# Altium PCB cps_tc_pishield.PcbDoc
Units mm, origin at the board's own origin, x right, y up, seen from the top; angles counter-clockwise.
Board outline 64.99 x 56 mm, 4 copper layers (Top Layer, Int1 (GND), Int2 (PWR), Bottom Layer), stack 1.369 mm thick; 32 components, 44 nets, 160 pads, 74 vias.
Unrouted connection lines stored in the file: 2.
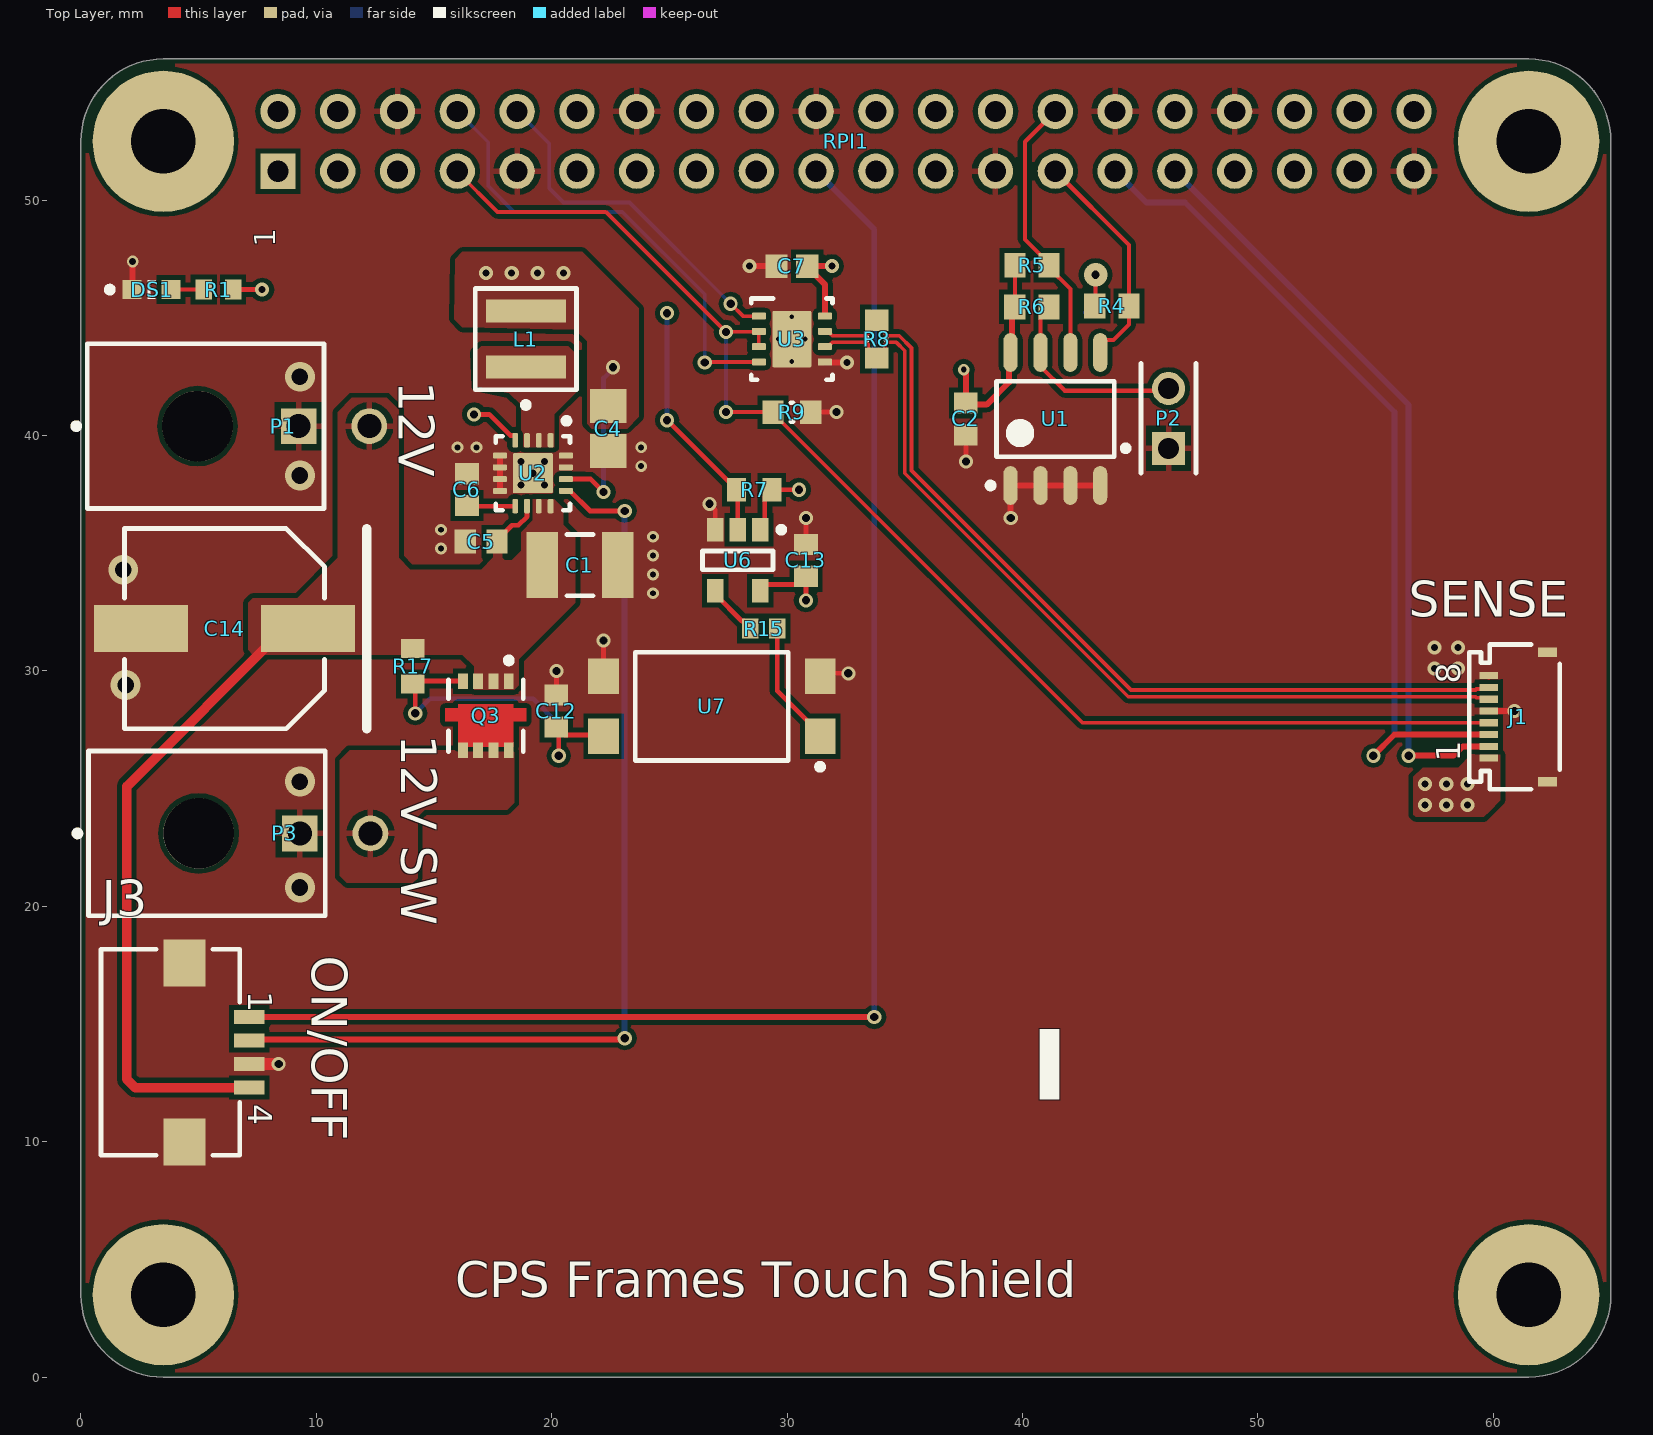
[diagram p0: Top Layer view]
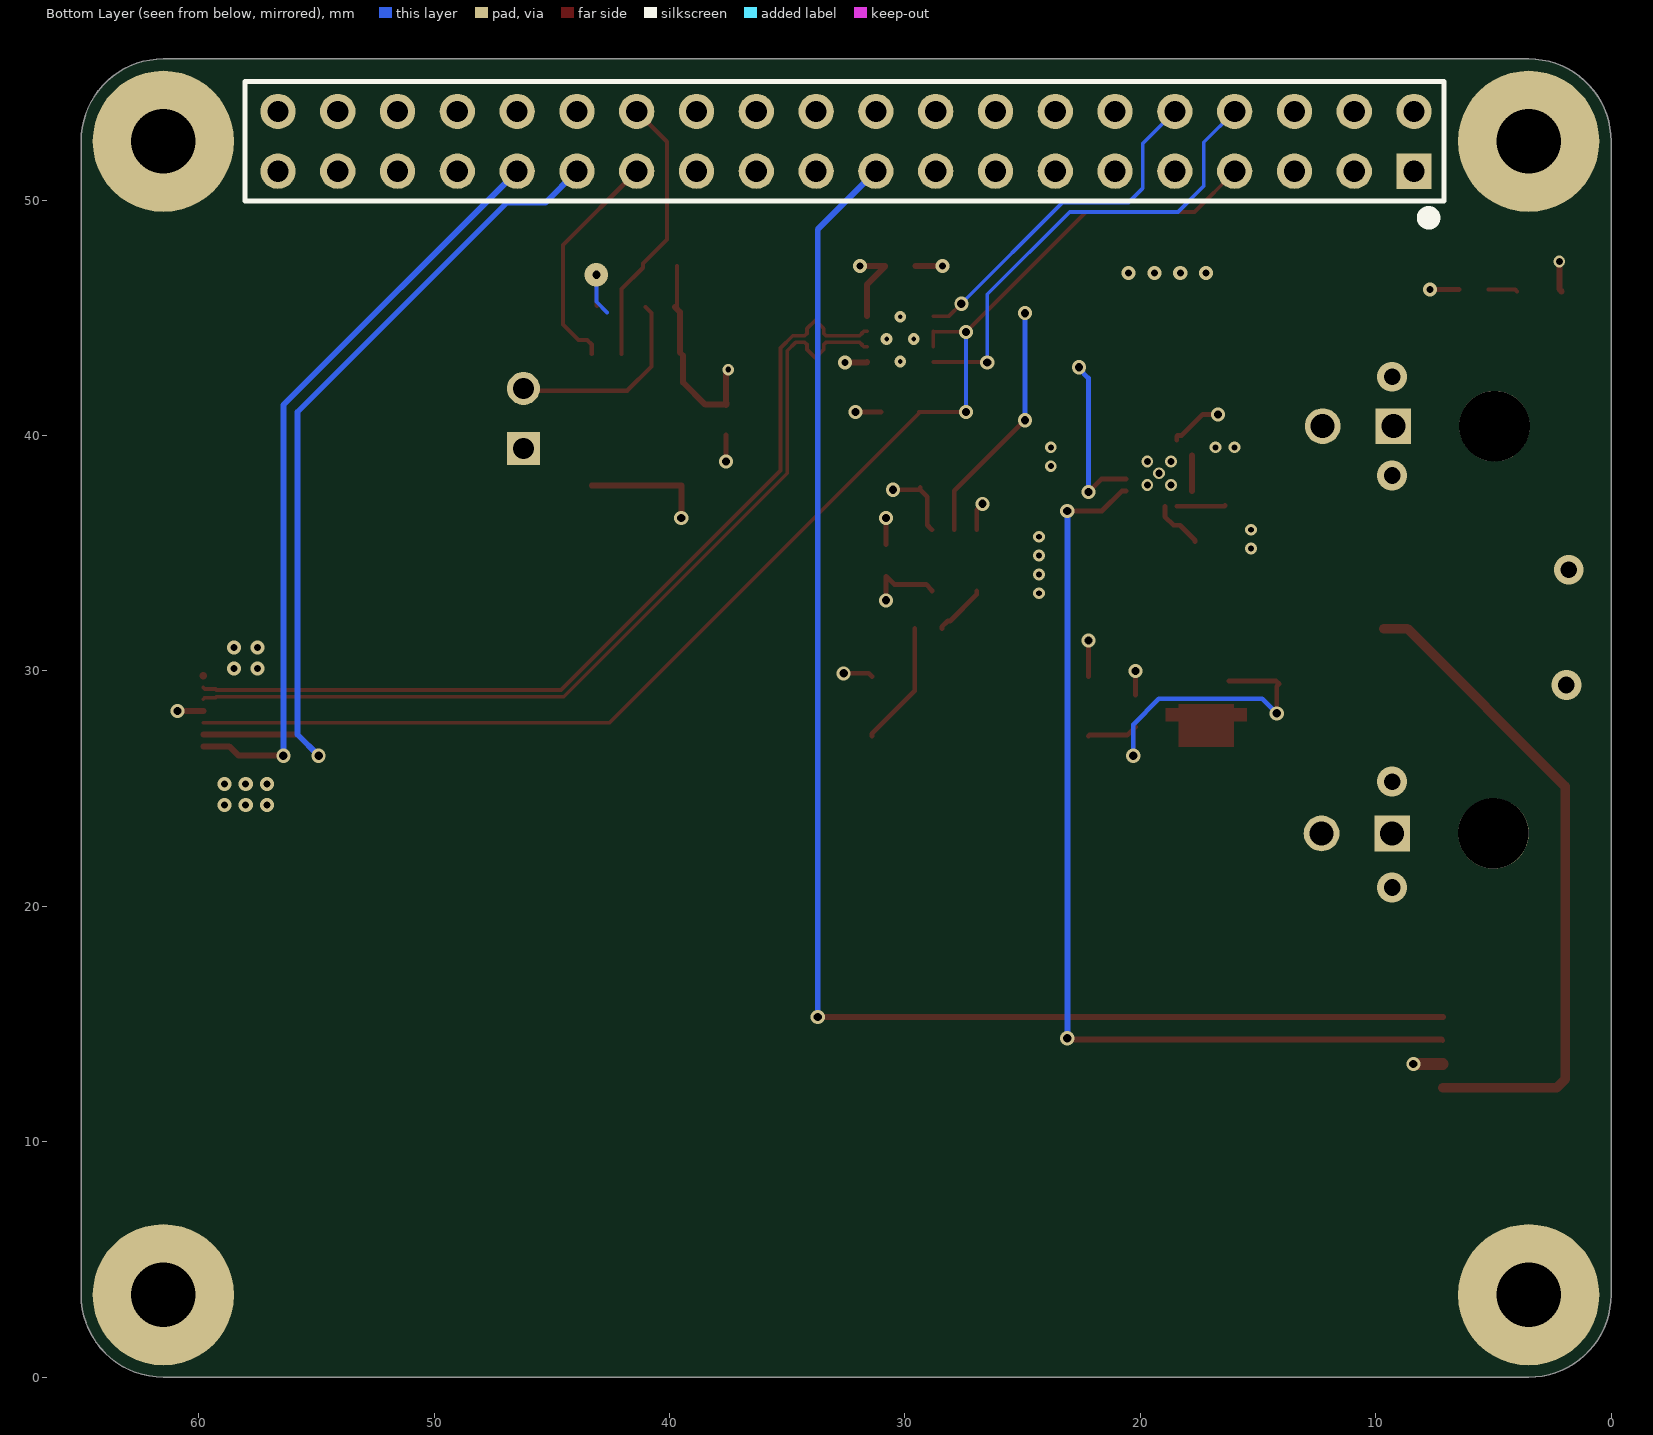
[diagram p1: Bottom Layer view, seen from below]
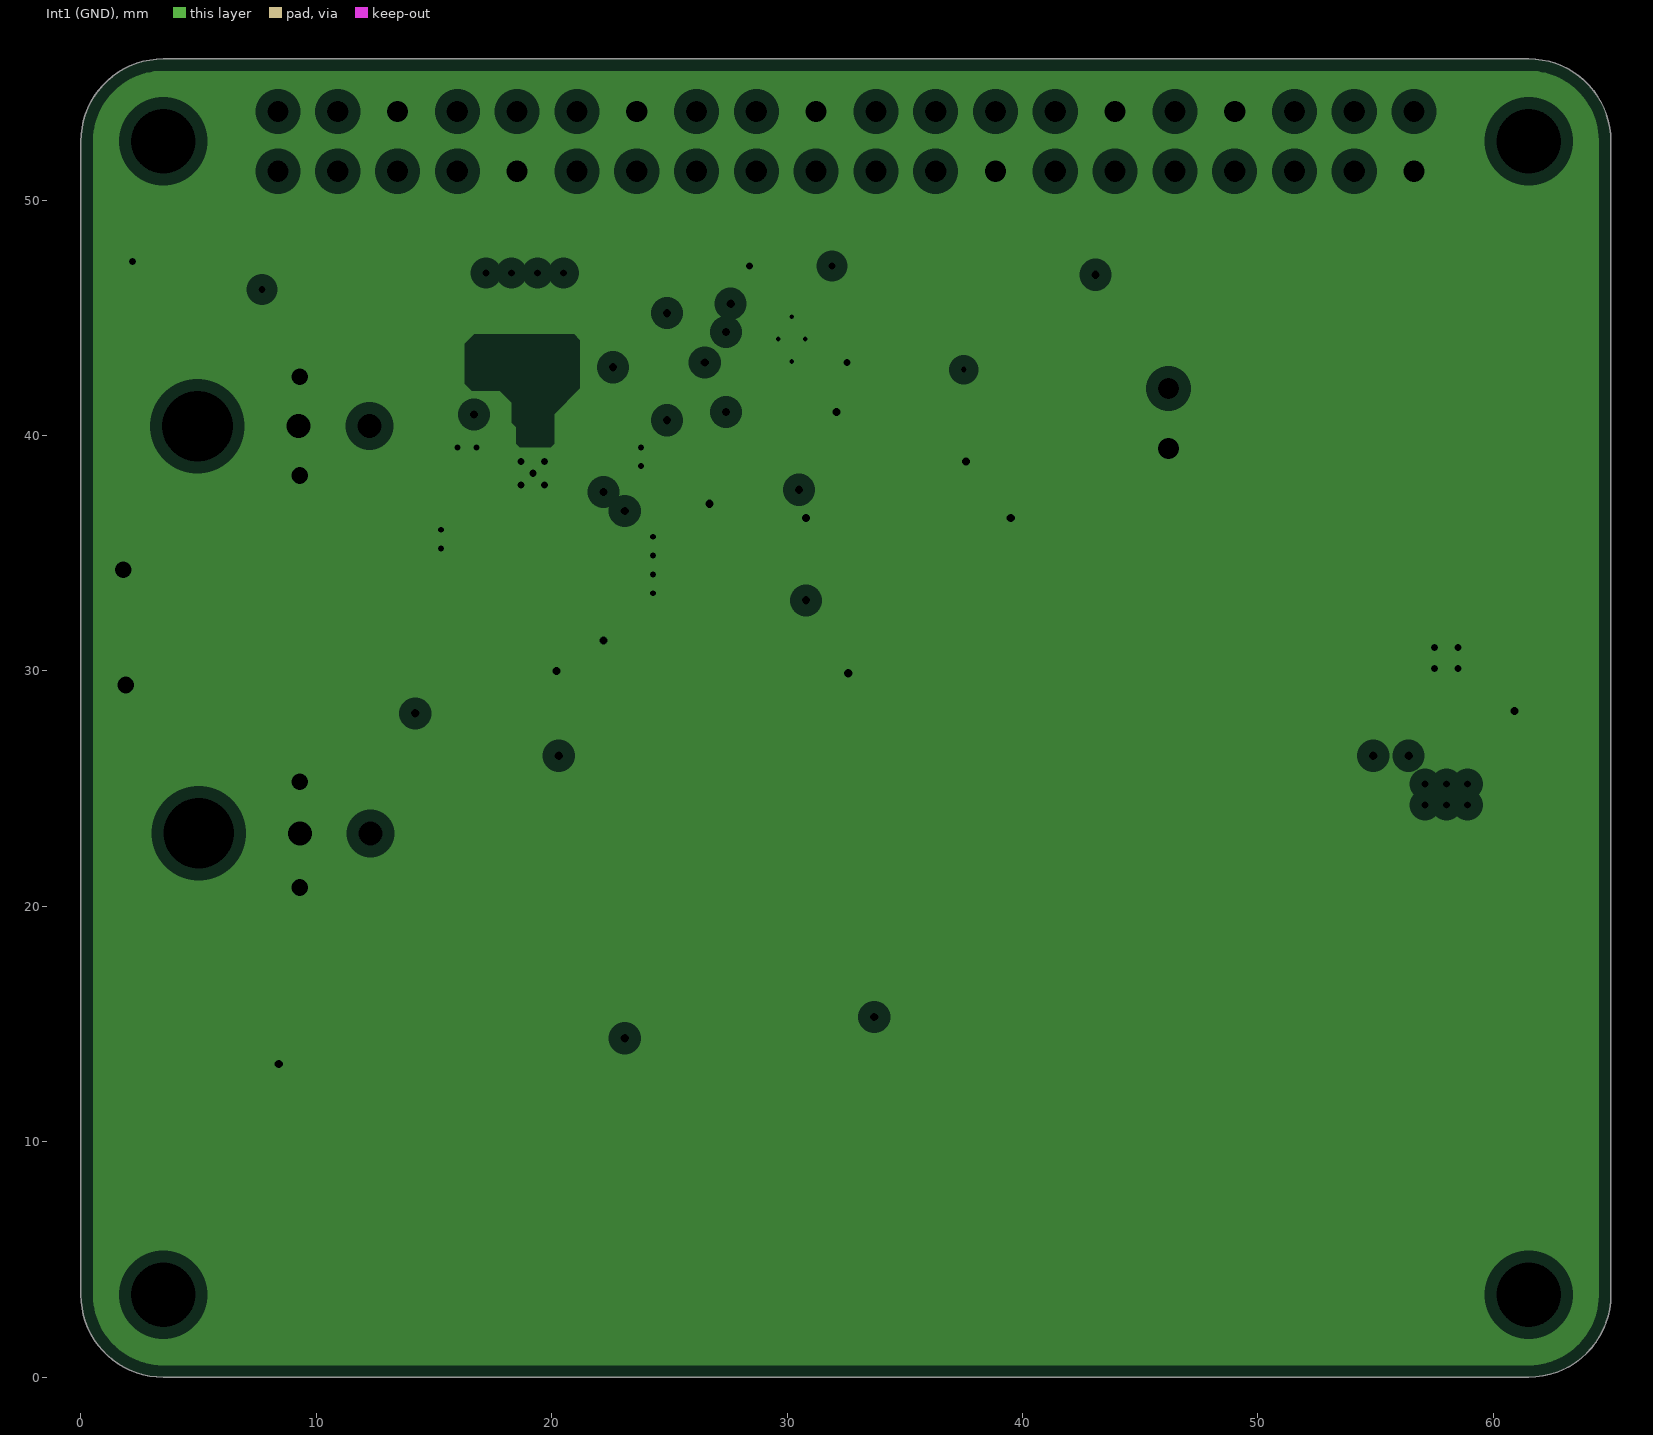
[diagram p2: Int1 (GND), clearances drawn from the general rule]
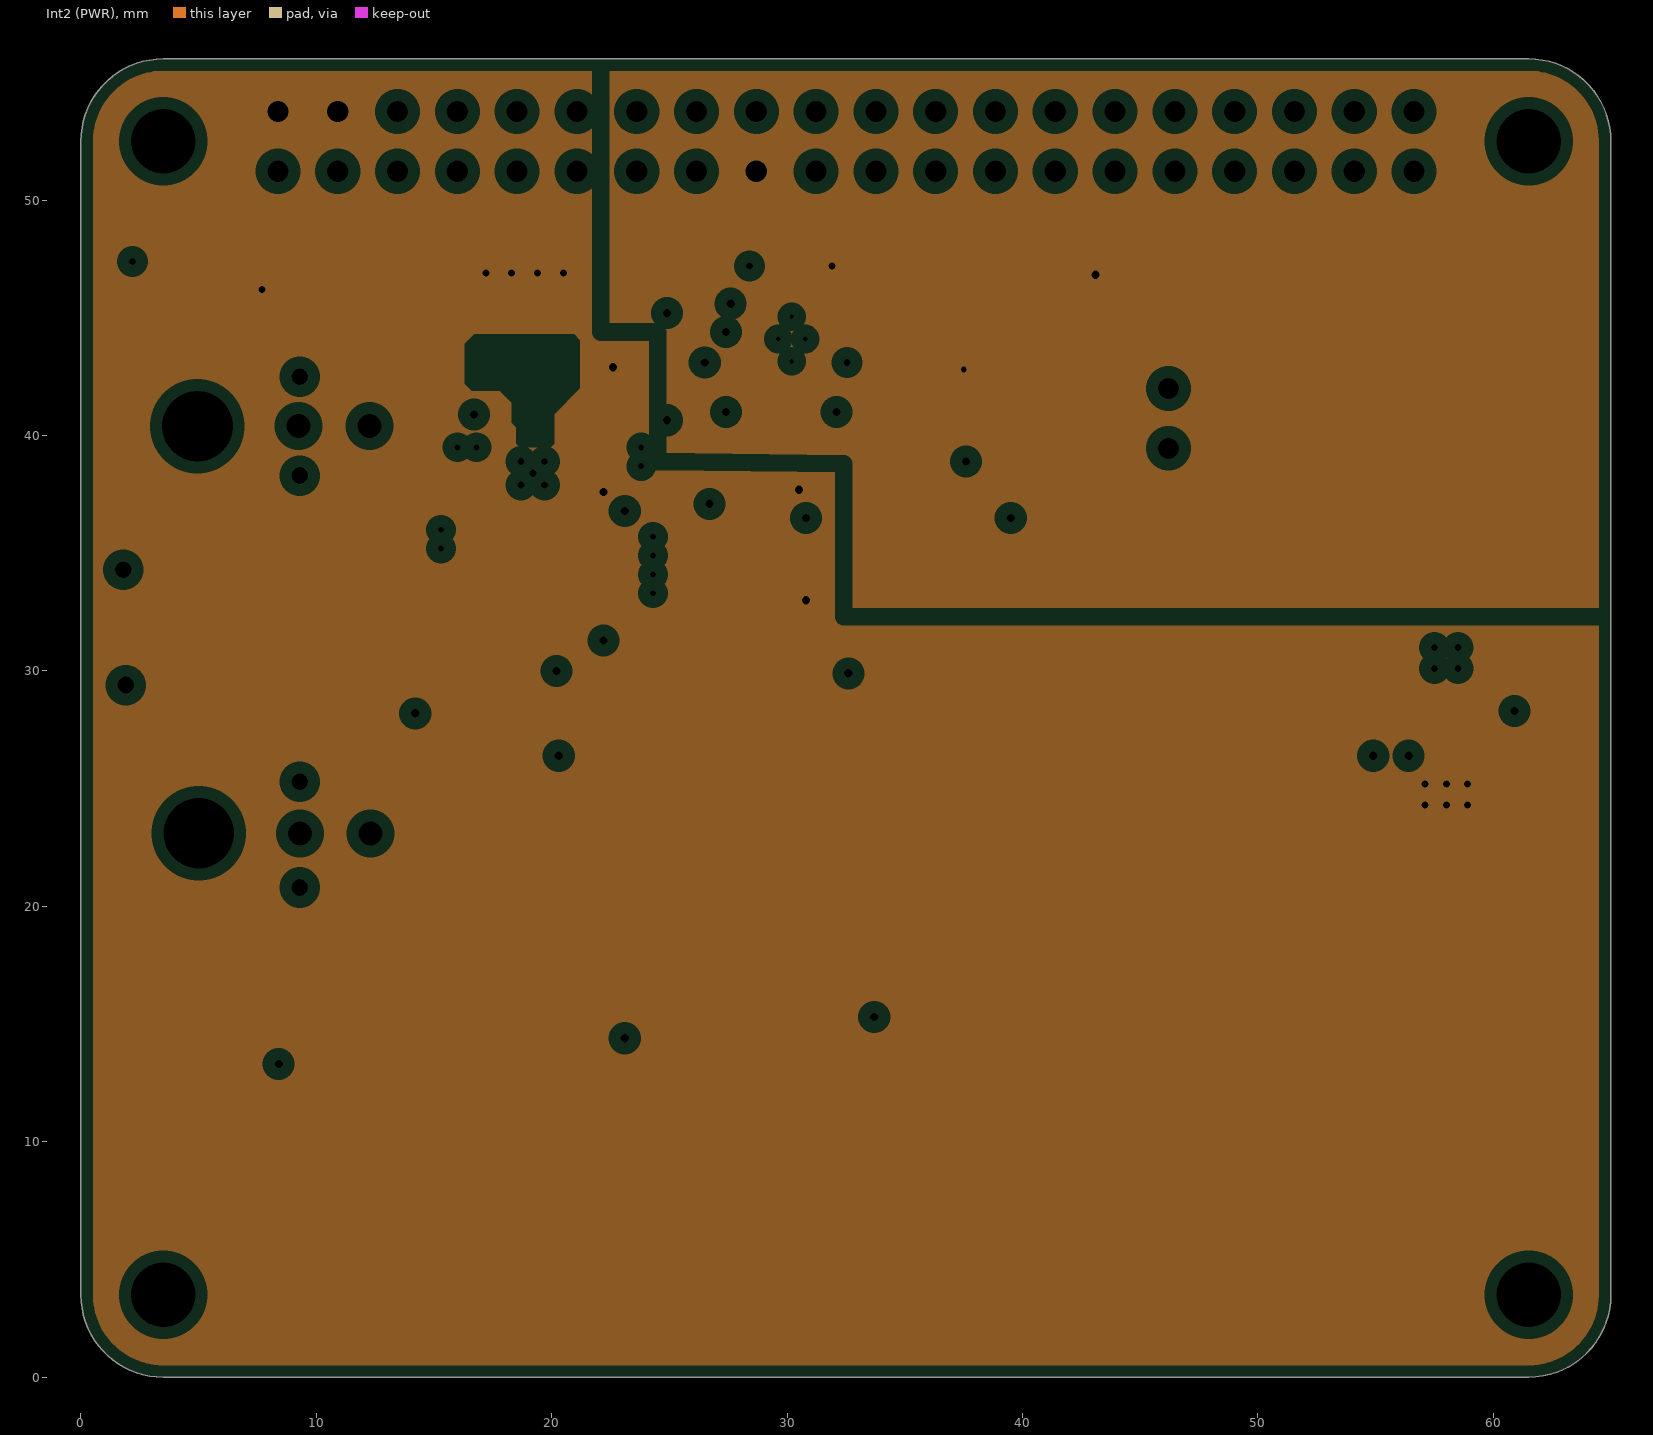
[diagram p3: Int2 (PWR), clearances drawn from the general rule]

## Layer stack, top to bottom
Top Solder: solder mask 0.0254, SM-001, Dk 4
Top Layer: signal copper 0.035
Dielectric 1: prepreg 0.1295, PP-017, Dk 4.3
Dielectric 2: prepreg 0.1295, PP-017, Dk 4.3
Int1 (GND): plane copper 0.035, net GND
Dielectric 3: core 0.7112, Core-039, Dk 4.8
Int2 (PWR): plane copper 0.035, net (Multiple Nets)
Dielectric 4: prepreg 0.1295, PP-017, Dk 4.3
Dielectric 5: prepreg 0.1295, PP-017, Dk 4.3
Bottom Layer: signal copper 0.035
Bottom Solder: solder mask 0.0254, SM-001, Dk 4

## Board outline
0,3.5 ccw(c3.5,3.5) 3.5,0 61.5,0 ccw(c61.496,3.496) 64.992,3.5 64.992,52.5 ccw(c61.496,52.504) 61.5,56 3.5,56 ccw(c3.5,52.5) 0,52.5

## Design rules (kind name [scope] priority, off if disabled: settings)
BoardOutlineClearance [All] p1: gap=0.2 ignorepadtopadclearanceinfootprint=FALSE except(0.4: Arc-SplitBarrior Arc-SplitContinuation Track-SplitBarrior Track-SplitContinuation SMDPad-SplitBarrior SMDPad-SplitContinuation THPad-SplitBarrior THPad-SplitContinuation Via-SplitBarrior Via-SplitContinuation Fill-SplitBarrior Fill-SplitContinuation Poly-SplitBarrior Poly-SplitContinuation Region-SplitBarrior Region-SplitContinuation Text-SplitBarrior Text-SplitContinuation)
Clearance [All] p1: gap=0.2 ignorepadtopadclearanceinfootprint=FALSE except(0.089: Arc-Arc Arc-Track Arc-SMDPad Track-Track Track-SMDPad SMDPad-SMDPad; 0.127: Arc-Via Track-Via SMDPad-Via THPad-Via Via-Via; 0.254: Arc-Text Track-Text SMDPad-Text THPad-Text Via-Text Fill-Text Poly-Text Region-Text Text-Text)
Clearance "Clearance Bottom Layer" [OnLayer('Bottom Layer')] p2: gap=0.203 ignorepadtopadclearanceinfootprint=TRUE except(0.254: Arc-Text Track-Text SMDPad-Text THPad-Text Via-Text Fill-Text Poly-Text Region-Text Text-Text)
Clearance "Clearance Top Layer" [OnLayer('Top Layer')] p3: gap=0.203 ignorepadtopadclearanceinfootprint=TRUE except(0.254: Arc-Text Track-Text SMDPad-Text THPad-Text Via-Text Fill-Text Poly-Text Region-Text Text-Text)
DiffPairsRouting RS485 [InDifferentialPair('RS485')] p1: maxlimit=0.127 minlimit=0.127 mostfreqgap=0.127 toplayer_minwidth=0.157 toplayer_maxwidth=0.157 toplayer_prefwidth=0.157 bottomlayer_minwidth=0.157 bottomlayer_maxwidth=0.157 bottomlayer_prefwidth=0.157 impedanceprofiledriven=TRUE impedanceprofileid={2957A7B5-88C2-4469-BF19-BCCFE4860604} impedanceprofilevalue=100.000000 maxuncoupledlength=12.7
DiffPairsRouting [All] p2: maxlimit=0.254 minlimit=0.254 mostfreqgap=0.254 toplayer_minwidth=0.381 toplayer_maxwidth=0.381 toplayer_prefwidth=0.381 bottomlayer_minwidth=0.381 bottomlayer_maxwidth=0.381 bottomlayer_prefwidth=0.381 maxuncoupledlength=12.7
HoleSize [All] p1: absolutevalues=TRUE maxlimit=6.3 minlimit=0.2 maxpercent=80.000 minpercent=20.000
MinimumAnnularRing [All] p1: minimumring=0.076
MinimumSolderMaskSliver [All] p1: minsoldermaskwidth=0.1
PlaneClearance [All] p1: clearance=0.508
PlaneConnect [All] p1: pad.planeconnectstyle=Relief pad.reliefexpansion=0.508 pad.reliefentries=4 pad.reliefconductorwidth=0.254 pad.reliefairgap=0.254 via.planeconnectstyle=Direct via.reliefexpansion=0.508 via.reliefentries=4 via.reliefconductorwidth=0.254 via.reliefairgap=0.254
PolygonConnect PolygonConnect_GND [InNet('GND') vs InNet('GND')] p1: thpad.connectstyle=Relief thpad.reliefconductorwidth=0.254 thpad.reliefentries=4 thpad.polygonreliefangle="90 Angle" thpad.airgapwidth=0.254 smdpad.connectstyle=Direct smdpad.reliefconductorwidth=0.254 smdpad.reliefentries=4 smdpad.polygonreliefangle="90 Angle" smdpad.airgapwidth=0.254 via.connectstyle=Direct via.reliefconductorwidth=0.254 via.reliefentries=4 via.polygonreliefangle="90 Angle" via.airgapwidth=0.254
PolygonConnect PolygonConnect_VIN [InNet('VIN') vs InNet('VIN')] p2: thpad.connectstyle=Relief thpad.reliefconductorwidth=0.254 thpad.reliefentries=4 thpad.polygonreliefangle="90 Angle" thpad.airgapwidth=0.254 smdpad.connectstyle=Direct smdpad.reliefconductorwidth=0.254 smdpad.reliefentries=4 smdpad.polygonreliefangle="90 Angle" smdpad.airgapwidth=0.254 via.connectstyle=Direct via.reliefconductorwidth=0.254 via.reliefentries=4 via.polygonreliefangle="90 Angle" via.airgapwidth=0.254
PolygonConnect PolygonConnect_SW [InNet('SW') vs InNet('SW')] p3: thpad.connectstyle=Relief thpad.reliefconductorwidth=0.254 thpad.reliefentries=4 thpad.polygonreliefangle="90 Angle" thpad.airgapwidth=0.254 smdpad.connectstyle=Direct smdpad.reliefconductorwidth=0.254 smdpad.reliefentries=4 smdpad.polygonreliefangle="90 Angle" smdpad.airgapwidth=0.254 via.connectstyle=Direct via.reliefconductorwidth=0.254 via.reliefentries=4 via.polygonreliefangle="90 Angle" via.airgapwidth=0.254
PolygonConnect PolygonConnect_5V [InNet('+5') vs InNet('+5')] p4: thpad.connectstyle=Relief thpad.reliefconductorwidth=0.254 thpad.reliefentries=4 thpad.polygonreliefangle="90 Angle" thpad.airgapwidth=0.254 smdpad.connectstyle=Direct smdpad.reliefconductorwidth=0.254 smdpad.reliefentries=4 smdpad.polygonreliefangle="90 Angle" smdpad.airgapwidth=0.254 via.connectstyle=Direct via.reliefconductorwidth=0.254 via.reliefentries=4 via.polygonreliefangle="90 Angle" via.airgapwidth=0.254
PolygonConnect PolygonConnect_VSWITCH [InNet('VSWITCH') vs InNet('VSWITCH')] p5: thpad.connectstyle=Relief thpad.reliefconductorwidth=0.254 thpad.reliefentries=4 thpad.polygonreliefangle="90 Angle" thpad.airgapwidth=0.254 smdpad.connectstyle=Direct smdpad.reliefconductorwidth=0.254 smdpad.reliefentries=4 smdpad.polygonreliefangle="90 Angle" smdpad.airgapwidth=0.254 via.connectstyle=Direct via.reliefconductorwidth=0.254 via.reliefentries=4 via.polygonreliefangle="90 Angle" via.airgapwidth=0.254
PolygonConnect [All] p6: thpad.connectstyle=Relief thpad.reliefconductorwidth=0.508 thpad.reliefentries=4 thpad.polygonreliefangle="90 Angle" thpad.airgapwidth=0.254 smdpad.connectstyle=Relief smdpad.reliefconductorwidth=0.508 smdpad.reliefentries=4 smdpad.polygonreliefangle="90 Angle" smdpad.airgapwidth=0.254 via.connectstyle=Direct via.reliefconductorwidth=0.508 via.reliefentries=4 via.polygonreliefangle="90 Angle" via.airgapwidth=0.254
RoomDefinition U_TC_switch_to_shield_connection [InComponentClass('U_TC_switch_to_shield_connection')] p1: confinementstyle=ConfineIn formatcopy=TRUE lockcomponents=FALSE outline 8.3,19.1 8.3,8.031 0.149,8.031 0.149,19.1
RoomDefinition U_TC_SMPS [InComponentClass('U_TC_SMPS')] p2: confinementstyle=ConfineIn formatcopy=TRUE lockcomponents=FALSE outline -0.704,36.421 -0.704,44.379 0.721,44.379 0.721,46.979 4.457,46.979 4.457,47.079 7.215,47.079 7.215,46.629 21.429,46.629 21.429,42.729 23.979,42.729 23.979,38.979 30.529,38.979 30.529,36.329 31.829,36.329 31.829,31.179 32.429,31.179 32.429,25.426 13.572,25.426 13.572,19.121 -0.654,19.121 -0.654,36.421
RoomDefinition U_TC_Interface [InComponentClass('U_TC_Interface')] p3: confinementstyle=ConfineIn formatcopy=TRUE lockcomponents=FALSE outline 28.096,41.996 28.096,46.204 28.571,46.204 28.571,48.229 31.829,48.229 31.829,46.204 32.304,46.204 32.304,45.879 34.829,45.879 63.304,45.879 63.304,31.604 63.304,24.496 57.178,24.496 57.178,39.971 28.421,39.971 28.421,41.996
RoomDefinition "U_RPI Hat ID" [InComponentClass('U_RPI Hat ID')] p4: confinementstyle=ConfineIn formatcopy=TRUE lockcomponents=FALSE outline 36.566,39.076 36.566,42.334 38.116,42.334 38.116,45.134 38.416,45.134 38.416,46.794 38.421,46.794 38.421,48.559 42.379,48.559 42.379,46.834 45.774,46.834 45.774,43.444 47.749,43.444 47.749,38.016 44.674,38.016 44.674,36.276 38.116,36.276 38.116,39.076
RoomDefinition "U_RPI 3" [InComponentClass('U_RPI 3')] p5: confinementstyle=ConfineIn formatcopy=TRUE lockcomponents=FALSE outline 6.721,49.606 6.721,55.394 58.381,55.394 58.381,49.606
RoutingCorners [All] p1: cornerstyle=Round minsetback=2.54 maxsetback=2.54
RoutingVias [All] p1: holewidth=0.5 width=1 viastyle="Through Hole" minholewidth=0.2 minwidth=0.45 maxholewidth=1 maxwidth=2
SilkToSilkClearance [All] p1: silktosilkclearance=0.1
SilkToSolderMaskClearance [IsPad] p1: minsilkscreentomaskgap=0.1 clearancetoexposedcopper=TRUE
SolderMaskExpansion [All] p1: expansion=0.102
Width [All] p1: maxlimit=2.54 minlimit=0.089 preferedwidth=0.381
22 further rules are at their usual default settings.

## Classes and differential pairs
component class U_TC_switch_to_shield_connection: J3
component class U_TC_SMPS: C1 C4 C5 C6 C12 C13 C14 DS1 L1 P1 P3 Q3 R1 R7 R15 R17 U2 U6 U7
component class U_TC_Interface: C7 J1 R8 R9 U3
component class "U_RPI Hat ID": C2 P2 prog R4 R5 R6 U1
component class "U_RPI 3": RPI1
differential pair RS485: +RS485_P -RS485_N

## Components (designator, comment, footprint, x,y, rotation, side; value= is the part's Value field where it differs from the comment)
C1 "10uF" CAPC1210(3225)210_M 21.2,34.5 r180 top
C2 "0.1uF" CAPC1608X87X35NL15T15 37.595,40.705 r270 top
C4 "22uF" CAPC2013X95X45ML15T25 22.4,40.3 r90 top
C5 "0.1uF" CAPC1608X87X35NL15T15 17,35.5 r180 top
C6 "3.3nF" CAPC1608X87X35NL15T15 16.4,37.7 r270 top
C7 "0.1uF" CAPC1608X95X40NL15T15 30.2,47.2 r0 top
C12 "0.1uF" CAPC1608X87X35NL15T15 20.2,28.3 r90 top
C13 "0.1uF" CAPC1608X87X35NL15T15 30.8,34.7 r90 top
C14 "470uF" PNSC-FK-V-F_V 6.1,31.8 r180 top
DS1 "APG1608SURKC/T" KING-LED0603-25-RED_V 3,46.2 r180 top
J1 "687108182122" 687108182122 60.9,28.05 r90 top
J3 "686104148922" 686104148922 3.8,13.8 r270 top
L1 "XFL4020-222MEC" COIL-IND-2_V 18.9,44.1 r90 top
P1 "66200221022" 66200221022 5.3,40.4 r270 top
P2 "5-146280-2" TECO-5-146280-2_V 46.2,40.73 r90 top
P3 "66200221022" 66200221022 5.35,23.1 r270 top
Q3 "NTTFS3A08PZTAG" ONSC-WDFN-8-511AB_V 17.2,28.1 r270 top
R1 "1K" RESC1608X55X30LL15T15 5.836,46.2 r0 top
R4 "3.9K" RESC1608X55X30ML15T15 43.795,45.505 r180 top
R5 "3.9K" RESC1608X55X30ML15T15 40.4,47.23 r180 top
R6 "1K" RESC1608X55X30ML15T15 40.395,45.465 r180 top
R7 "100k" RESC1608X55X25ML10T15 28.6,37.7 r0 top
R8 "100R" RESC0603(1608)_N 33.8,44.1 r90 top value="10000.00 Ohm"
R9 "10K" RESC0603(1608)_N 30.2,41 r0 top value="10000.00 Ohm"
R15 "220R" RESC1609X50X30LL10T20 29,31.8 r0 top
R17 "100k" RESC1608X55X25ML10T15 14.1,30.2 r90 top
RPI1 "RPI GPIO Connector" RPI 32.5,52.5 r180 top locked
U1 "M24C02-WMN6TP" STM-M24C02-WMN6TP-8_M 41.395,40.705 r90 top
U2 "TPS62143RGTT" RGT0016C_V 19.2,38.4 r270 top
U3 "SN65HVD75DRBT" DRB0008B_V 30.2,44.1 r0 top
U6 "NC7SZ08M5X" FAIR-SOT23-5_V 27.9,34.7 r270 top
U7 "FOD817BSD" FAIR-MDIP-4_V 26.8,28.5 r180 top

## Footprints (in the part's own frame and the unit in brackets; to place one, negate y for a bottom-side part, rotate by r counter-clockwise, add the part's x,y. Pads: shape width x height; smd on the part's side, far side on the other; paste and mask are expansions set on the pad)
66200221022 [mm] "Dual row Right angle header With plastic peg 02p"
  rect 1.52x1.52 hole 1.02: 1(0,3.95)
  round 1.52 hole 1.02: 2(0,6.95)
  round 3 hole 3 unplated: MH1(0,-0.35)
  silkscreen extent -3.5,-5.62 3.5,5.02, body extent -3.35,-4.95 3.35,7.27, height 8.79
686104148922 [mm] "ZIF Connectors, Horizontal, Bottom Contact Hinge Type, pitch 1mm, 4p"
  rect 0.6x1.3 smd: 1(-1.5,3.35) 2(-0.5,3.35) 3(0.5,3.35) 4(1.5,3.35)
  rect 2x1.8 smd: MP1(-3.8,0.6) MP2(3.8,0.6)
  silkscreen extent -4.38,-2.95 4.38,2.95, body extent -4.3,-2.9 4.3,3.6, height 2.27
687108182122 [mm] "ZIF Connectors, Horizontal, Dual Contact Back Locking, pitch 0.5mm, 8p"
  rect 0.3x0.8 smd: 1(-1.75,1.1) 2(-1.25,1.1) 3(-0.75,1.1) 4(-0.25,1.1) 5(0.25,1.1) 6(0.75,1.1) 7(1.25,1.1) 8(1.75,1.1)
  rect 0.4x0.8 smd: MP1(-2.75,-1.4) MP2(2.75,-1.4)
  silkscreen extent -3.07,-1.92 3.08,1.92, body extent -3,-1.85 3,1.85, height 0.98
CAPC1210(3225)210_M [mm] "Chip Capacitor, Body 3.2x2.5mm, Height 2.1mm, IPC Low Density"
  rect 1.35x2.8 smd: 1(-1.6,0) 2(1.6,0)
  silkscreen extent -0.55,-1.3 0.55,1.3, body extent -1.7,-1.35 1.7,1.35, height 2.1
CAPC1608X87X35NL15T15 [mm] "Chip Capacitor, 2-Leads, Body 1.60x0.80mm, IPC Medium Density"
  rect 0.9x1 smd: 1(-0.675,0) 2(0.675,0)
  body extent -0.87,-0.48 0.87,0.47, height 0.87
CAPC1608X95X40NL15T15 [mm] "Chip Capacitor, 2-Leads, Body 1.60x0.80mm, IPC Medium Density"
  rect 0.95x1 smd: 1(-0.65,0) 2(0.65,0)
  body extent -0.88,-0.48 0.87,0.47, height 0.95
CAPC2013X95X45ML15T25 [mm] "Chip Capacitor, 2-Leads, Body 2.00x1.25mm, IPC Low Density"
  rect 1.45x1.55 smd: 1(-0.95,0) 2(0.95,0)
  body extent -1.08,-0.7 1.07,0.7, height 0.95
COIL-IND-2_V [mm] "Inductor, 2-Leads, Body 4.3x4.3mm, Pitch 2.37mm"
  rect 0.98x3.4 smd paste+0: 1(-1.185,0) 2(1.185,0)
  silkscreen extent -2.92,-2.15 2.15,2.15, body extent -2.15,-2.15 2.15,2.15, height 2.1
DRB0008B_V [mm] "SON, 8-Leads, Body 3x3mm, Pitch 0.65mm, Thermal Pad 2.4x1.65mm, TI Recommended"
  rrect33% 0.6x0.3 smd: 1(-1.4,0.975) 2(-1.4,0.325) 3(-1.4,-0.325) 4(-1.4,-0.975) 5(1.4,-0.975) 6(1.4,-0.325) 7(1.4,0.325) 8(1.4,0.975)
  rrect6% 1.65x2.4 smd paste-1.2: 9(0,0)
  silkscreen extent -1.73,-1.73 1.73,1.73, body extent -1.5,-1.5 1.5,1.5, height 0.96
FAIR-MDIP-4_V [mm] "SMD, 4-Leads, Body 6.5x4.6mm, Pitch 2.54mm"
  rect 1.3x1.5 smd: 1(-4.6,1.27) 2(-4.6,-1.27) 3(4.6,-1.27) 4(4.6,1.27)
  silkscreen extent -4.73,-2.3 3.25,2.69, body extent -5.08,-2.3 5.08,2.3, height 3.85
FAIR-SOT23-5_V [mm] "SOT23, 5-Leads, Body 3x1.7mm, Pitch 0.95mm"
  rect 1x0.7 smd: 1(-1.3,0.95) 2(-1.3,0) 3(-1.3,-0.95) 4(1.3,-0.95) 5(1.3,0.95)
  silkscreen extent -1.42,-1.5 0.4,1.98, body extent -1.5,-1.5 1.5,1.5, height 1.45
KING-LED0603-25-RED_V [mm] "LED, SMT, Body 1.6x0.8mm, 0.28mm Thickness, Red"
  rect 0.8x0.8 smd paste+0: 1(-0.825,0) 2(0.825,0)
  silkscreen extent -0.2,-0.4 1.9,0.4, body extent -0.8,-0.4 0.8,0.4, height 0.28
ONSC-WDFN-8-511AB_V [mm] "DFN, 8-Leads, Body 3.05x3.05mm, Pitch 0.65mm"
  rect 0.66x0.42 smd: 1(-1.47,0.975) 2(-1.47,0.325) 3(-1.47,-0.325) 4(-1.47,-0.975) 5(1.47,-0.975) 6(1.47,-0.325) 7(1.47,0.325) 8(1.47,0.975)
  Top Layer region: 0.25,-1.73 0.25,1.73 -0.32,1.73 -0.32,-1.73
  Top Layer region: 1.33,-1.185 1.33,1.185 -0.5,1.185 -0.5,-1.185
  silkscreen extent -2.47,-1.59 1.53,1.59, body extent -1.53,-1.53 1.53,1.53, height 0.8
PNSC-FK-V-F_V [mm] "CAPAE, 2-Leads, Body 8.50x8.50mm"
  rect 4x2 smd: 1(-3.55,0) 2(3.55,0)
  silkscreen extent -6.05,-4.25 4.25,4.25, body extent -5,-4.25 5,4.25, height 10.5
RESC0603(1608)_N [mm] "Chip Resistor, Body 1.6x0.8mm, IPC Medium Density"
  rect 0.9x1 smd: 1(-0.8,0) 2(0.8,0)
  silkscreen extent -0.05,-0.4 0.05,0.4, body extent -0.85,-0.47 0.85,0.47, height 0.6
RESC1608X55X25ML10T15 [mm] "Chip Resistor, 2-Leads, Body 1.60x0.80mm, IPC Low Density"
  rect 0.8x1 smd: 1(-0.75,0) 2(0.75,0)
  body extent -0.85,-0.45 0.85,0.45, height 0.55
RESC1608X55X30LL15T15 [mm] "Chip Resistor, 2-Leads, Body 1.60x0.80mm, IPC High Density"
  rect 0.7x0.85 smd: 1(-0.625,0) 2(0.625,0)
  body extent -0.87,-0.48 0.87,0.48, height 0.55
RESC1608X55X30ML15T15 [mm] "Chip Resistor, 2-Leads, Body 1.60x0.80mm, IPC Low Density"
  rect 0.9x1.05 smd: 1(-0.725,0) 2(0.725,0)
  body extent -0.87,-0.48 0.87,0.48, height 0.55
RESC1609X50X30LL10T20 [mm] "Chip Resistor, 2-Leads, Body 1.55x0.85mm, IPC High Density"
  rect 0.7x0.85 smd: 1(-0.575,0) 2(0.575,0)
  body extent -0.82,-0.48 0.82,0.48, height 0.5
RGT0016C_V [mm] "QFN, 16-Leads, Body 3x3mm, Pitch 0.5mm, Thermal Pad 1.65x1.65mm"
  rrect40% 0.6x0.25 smd: 1(-1.4,0.75) 2(-1.4,0.25) 3(-1.4,-0.25) 4(-1.4,-0.75) 9(1.4,-0.75) 10(1.4,-0.25) 11(1.4,0.25) 12(1.4,0.75)
  rrect40% 0.25x0.6 smd: 5(-0.75,-1.4) 6(-0.25,-1.4) 7(0.25,-1.4) 8(0.75,-1.4) 13(0.75,1.4) 14(0.25,1.4) 15(-0.25,1.4) 16(-0.75,1.4)
  rrect6% 1.55x1.55 on Top Paste: 17(0,0)
  rrect6% 1.7x1.7 smd paste-0.85: 17(0,0)
  silkscreen extent -2.35,-1.57 1.57,1.58, body extent -1.5,-1.5 1.5,1.5, height 1
RPI [mm]
  rect 1.5x1.5 hole 0.9: 1(24.13,1.27)
  round 1.5 hole 0.9: 2(24.13,-1.27) 3(21.59,1.27) 4(21.59,-1.27) 5(19.05,1.27) 6(19.05,-1.27) 7(16.51,1.27) 8(16.51,-1.27) 9(13.97,1.27) 10(13.97,-1.27) 11(11.43,1.27) 12(11.43,-1.27) 13(8.89,1.27) 14(8.89,-1.27) 15(6.35,1.27) 16(6.35,-1.27) 17(3.81,1.27) 18(3.81,-1.27) 19(1.27,1.27) 20(1.27,-1.27) 21(-1.27,1.27) 22(-1.27,-1.27) 23(-3.81,1.27) 24(-3.81,-1.27) 25(-6.35,1.27) 26(-6.35,-1.27) 27(-8.89,1.27) 28(-8.89,-1.27) 29(-11.43,1.27) 30(-11.43,-1.27) 31(-13.97,1.27) 32(-13.97,-1.27) 33(-16.51,1.27) 34(-16.51,-1.27) 35(-19.05,1.27) 36(-19.05,-1.27) 37(-21.59,1.27) 38(-21.59,-1.27) 39(-24.13,1.27) 40(-24.13,-1.27)
  body extent -25.52,-2.63 25.53,2.38, height 8.5
STM-M24C02-WMN6TP-8_M [mm] "SOIC, 8-Leads, Body 5x4mm, Pitch 1.27mm, IPC Low Density"
  oval 1.65x0.6 smd: 1(-2.825,1.905) 2(-2.825,0.635) 3(-2.825,-0.635) 4(-2.825,-1.905) 5(2.825,-1.905) 6(2.825,-0.635) 7(2.825,0.635) 8(2.825,1.905)
  silkscreen extent -2.95,-2.5 1.6,2.88, body extent -2,-2.5 2,2.5, height 1.75
TECO-5-146280-2_V [mm] "Connector, 2-Leads, Body 4.67x2.34mm, Pitch 2.54mm"
  rect 1.4x1.4 hole 0.89: 1(-1.27,0)
  round 1.4 hole 0.89: 2(1.27,0)
  silkscreen extent -2.33,-1.17 2.33,1.94, body extent -2.34,-1.17 2.34,1.17, height 5.33

## Part data
C1: library part CMP-1038-02235-1, "CAP 10uF 35V ±20% 1210 (3225 Metric) Thickness 2.1mm SMD", Case-EIA=1210, Case-Metric=3225, Rated Voltage="35 V", Tolerance=±20%, Max Thickness="2.1 mm", Technology=SMT
C2 C5 C12 C13: library part CMP-2006-03300-1, Manufacturer=Kemet, Part Number=C0603X104K5RACTU
C4: library part CMP-2007-00096-1, Manufacturer=Murata, Part Number=GRM219R61A226MEA0D
C6: library part CMP-2006-03881-1, Manufacturer=Kemet, Part Number=C0603C332K5RAC7867
C7: library part CMP-2006-01884-1, Manufacturer=Vitramon, Part Number=VJ0603Y104JXQCW1BC
C14: library part CMP-2000-06204-1, "Aluminum Electrolytic Capacitor, 470 uF, +/- 20%, 16 V, 2-Pin SMD (Size Code F), -55 to 105 degC, RoHS, Tape and Reel", Capacitance=470µF, Case Size/Dimension=Ø8x10.2mm, Lifetime@Temperature=2000Hrs@105°C, Manufacturer=Panasonic, Operating Temp-Max=105°C, Operating Temp Range=-55to+105°C, Package Description="2-Pin Electrolytic Aluminum Capacitor, Body 8.3 x 8.3 mm", Package Reference=FK-V-F, Rated Voltage=16V, Ripple Current=600mA, Datasheet URL=http://industrial.panasonic.com/cdbs/www-data/pdf/RDE0000/ABA0000C1181.pdf, Datasheet Version=03/2016, Impedance=0.16O, Manufacturer URL=http://www.panasonic.com/, Mounting Technology=SurfaceMount, Package URL=http://industrial.panasonic.com/cdbs/www-data/pdf/RDE0000/DME0000COL48.pdf, Series=FK, Type=Can
DS1: library part CMP-0404-00004-1, "Ultra Thin Hyper Red SMD Chip LED Lamp, 2 to 2.5 V, -40 to 85 degC, Body 1.6 x 0.8 mm, 0.28 mm Thickness, RoHS, Tape and Reel", Forward Voltage="2 to 2.5 V", Manufacturer=Kingbright, Operating Temperature="-40 to 85 degC", ComponentLink1Description="Manufacturer URL", ComponentLink1URL=http://www.kingbrightusa.com/, ComponentLink2Description=Datasheet, ComponentLink2URL=http://www.kingbrightusa.com/images/catalog/SPEC/APG1608SURKC-T.pdf, ComponentLink3Description="Package Specification", ComponentLink3URL=http://www.kingbrightusa.com/images/catalog/SPEC/APG1608SURKC-T.pdf, DatasheetVersion="Rev. V.5A", Dice="Hyper Red (AlGaInP)", IR (Max)="10 uA", Lens Type="Water Clear", Luminous Intensity mcd @ 20 mA (Min.)=55, Luminous Intensity mcd @ 20 mA (Typ.)=110, Mounting Technology="Surface Mount", PackageDescription="2-Pin SMT, Body 1.6 x 0.8 mm, 0.28mm Thickness, Red", PackageReference=LED0603-25-RED, PackageVersion="Rev. V.5A", Packing="Tape and Reel", PartNumber=APG1608SURKC/T, RoHS=TRUE, Viewing Angle=120
J1: library part CMP-1502-01646-1, "SMT ZIF Connectors WR-FPC, Horizontal, Back Locking Dual Contact, pitch 0.5 mm, 8 pins", Contact Resistance=30mOhm, Manufacturer="Wurth Elektronik", Operating Temperature=-55to85degC, Rated Current=0.5A, Withstanding Voltage=250VAC, Working Voltage=50VAC, Contact Design=BackLockingDualContact, Datasheet URL=https://katalog.we-online.de/em/datasheet/687108182122.pdf, Manufacturer URL=http://www.we-online.de, Mounting Technology=SMT, Orientation=Horizontal, Package Reference=687108182122, Packaging=TapeandReel, Part Number=687108182122, Pin Number=8, Pitch=0.5mm, Publisher=WurthElektronik
J3: library part CMP-1502-01512-1, "SMT ZIF Connectors Hinge Type WR-FPC, Horizontal, Bottom Contact, pitch 1 mm, 4 pins", Contact Resistance=50mOhm, Manufacturer="Wurth Elektronik", Operating Temperature=-40to105degC, Rated Current=1A, Withstanding Voltage=500VAC, Working Voltage=100VAC, Contact Design=BottomContact, Datasheet URL=https://katalog.we-online.de/em/datasheet/686104148922.pdf, Manufacturer URL=http://www.we-online.de, Mounting Technology=SMT, Orientation=Horizontal, Package Reference=686104148922, Packaging=TapeandReel, Part Number=686104148922, Pin Number=4, Pitch=1mm, Publisher=WurthElektronik
L1: library part CMP-2000-05090-2, "High Temperature Shielded Power Inductor, 2.2 uH, +/- 20 %, -40 to 125 degC, 2-Pin SMD, RoHS, Tape and Reel", Case Height=2.1mm, Case Length=4.3mm, Inductance=2.2uH, Manufacturer=Coilcraft, Maximum DC Current=8A, Maximum DC Resistance=23.5mOhms, Operating Temperature Range=-40Cto+125C, Self Resonant Frequency=38MHz, Test Frequency=100kHz, Tolerance=20%, Case Width=4.3mm, Core Material=Composite, Datasheet URL=http://www.mouser.com/ds/2/597/xfl4020-270756.pdf, Datasheet Version=Jul-12, Dimensions=4.3mmWx4.3mmLx2.1mmH, Manufacturer URL=http://www.coilcraft.com/, Packaging=Reel, PartNumber=XFL4020-222MEC, Product=PowerInductors, RoHS=Details, Series=XFL4020, Shielding=Shielded, Termination Style=SMD/SMT
P1 P3: library part CMP-1502-00364-1, "THT Male Header WR-MPC3, with Snap-in Plastic Pegs, Right Angled, Dual Row, pitch 3 mm, 2 pins", Contact Resistance=10mOhm, Manufacturer="Wurth Elektronik", Operating Temperature=-40to105degC, Working Voltage=250VAC, Datasheet URL=https://katalog.we-online.de/em/datasheet/6620xx21022.pdf, Gender=Male, Manufacturer URL=http://www.we-online.de, Mounting Technology=THT, Orientation=RightAngled, Package Reference=66200221022, Packaging=Tube, Part Number=66200221022, Pin Number=2, Pitch=3mm, Publisher=WurthElektronik
P2: library part CMP-2000-07492-1, "Male Header, Pitch 2.54 mm, 1 x 2 Position, Height 8.21 mm, Tail Length 3.05 mm, -65 to 105 degC, RoHS, Bulk", Case\/Package=100, Colour=Black, Current Rating=3A, Flammability Rating=UL94V-0, High Temperature Housing=Yes, Manufacturer="TE Connectivity", Max Current Rating=5A, Max Operating Temperature=105degC, Min Operating Temperature=-65degC, Package Description="Male Header, Pitch 2.54 mm, 1 x 2 Position, Height 8.21 mm, Tail Length 3.05 mm", Package Quantity=500, Approvals=CSA, Board Standoff=No(Without), Connector Type=Header, Contact Gender=Male, Contact Material=CopperAlloy, Contact Mating Length=0.23inch, Contact Plating=Matte, Contact Protection=No(Without), Contact Shape=Square, Datasheet URL=http://www.te.com/commerce/DocumentDelivery/DDEController?Action=showdoc&DocId=Customer+Drawing%7F146280%7FH1%7Fpdf%7FEnglish%7FENG_CD_146280_H1.pdf%7F5-146280-2, Datasheet Version="Rev. H1, 08/2016", Depth=2.34mm, Gasket=No(Without), High Speed Serial Data Connector=No, Housing Colour=Black, Housing Material=Polymer, Keyed=No, Length=4.67mm, Manufacturer URL=http://www.te.com/, Mating Alignment=No(Without), Mating Connector Lock=No(Without), Mating Post Length=0.23inch, Mount=ThroughHole, Mounting Technology=ThroughHole, Number of Contacts=2, Number of Positions=2, Number of Rows=1, Orientation=Straight, Package Reference=5-146280-2, Packaging=Carton, Panel Mount Retention=No(Without), PCB Mounting Orientation=Vertical, PCB Mount Retention=Without, PCB Thickness=0.063inch, Pitch=2.54mm, Radiation Hardening=No, RoHSCompliant=true, Row Spacing=2.54mm, Selectively Loaded=No(Without), Stabilizers=No(Without), Termination=ThroughHole, Termination Post Length=0.12inch
Q3: library part CMP-1058-01043-1, "Power MOSFET, -20 V, -15 A, Single P-Channel, 8-Pin WDFN, Pb-Free, Tape and Reel", Manufacturer="On Semiconductor", Package Type="u8FL / WDFN-8", Channel Polarity="P Channel", Ciss Typ (pF)=5000, ComponentLink1Description="Manufacturer URL", ComponentLink1URL=http://www.onsemi.com/, ComponentLink2Description=Datasheet, ComponentLink2URL=http://www.onsemi.cn/pub_link/Collateral/NTTFS3A08PZ-D.PDF, ComponentLink3Description="Package Specification", ComponentLink3URL=http://www.onsemi.com/pub_link/Collateral/511AB.PDF, Configuration=Single, Coss Typ (pF)=600, Crss Typ (pF)=540, DatasheetVersion="Rev. 2", ID Max (A)=15, Mounting Technology="Surface Mount", PackageDescription="8-Pin Small Outline No-Lead, Body 3.05 x 3.05 mm, Pitch 0.65 mm", PackageReference=WDFN-8-511AB, PackageVersion="Rev. D, 04/2012", Packing="Tape and Reel", PartNumber=NTTFS3A08PZTAG, Qrr Typ (nC)=234, RoHS=Pb-Free, V(BR)DSS Min (V)=20, VGS(th) Max (V)=1, VGS Max (V)=8
R1 R4 R5 R6: library part CMP-2000-00180-1, Manufacturer=Panasonic, Part Number=ERJ-3EKF1001V
R7 R17: library part CMP-2100-03662-1, "Chip Resistor, 100 KOhm, +/- 1%, 0.1 W, -55 to 155 degC, 0603 (1608 Metric), RoHS, Tape and Reel", Case/Package=0603, Case Code (Metric)=1608, Manufacturer=Yageo, Max Operating Temperature=155degC, Min Operating Temperature=-55degC, Package Description="2-Pin Surface Mount Device, Body 1.6 x 0.8 mm", Power Rating=100mW, Resistance=100KOhm, Temperature Coefficient=100ppm/degreesC, Tolerance=1%, Voltage Rating=50V, Case Code (Imperial)=0603, Composition=ThickFilm, Datasheet URL=http://www.yageo.com/NewPortal/yageodocoutput?fileName=/pdf/R-Chip/PYu-RC_Group_51_RoHS_L_5.pdf, Datasheet Version="Rev. 5, 10/2016", Depth=0.8mm, Height=0.45mm, Lead Free=LeadFree, Length=1.6mm, Manufacturer URL=http://www.yageo.com/, Military Standard=Not, Number of Pins=2, Package Reference=0603, Packaging=TapeandReel, REACH SVHC=NoSVHC, RoHSCompliant=true, Termination=SMD/SMT, Voltage Rating (DC)=50V, Width=0.8mm
R8 R9: library part CMP-1012-00623-1, "10K 0.1W 1% 0603 (1608 Metric)  SMD", Case-EIA=0603, Case-Metric=1608, Power="0.1 W", Tolerance="1 %", Technology=SMT
R15: library part CMP-2000-03085-1, Manufacturer="Vishay Dale", Part Number=CRCW0603220RFKEA
RPI1: library part "rpi connector", "GPIO Header for Raspberry Pi A+/B+/Pi 2/Pi 3 - 2x20", Manufacturer="SparkFun Electronics", Manufacturer Part Number=PRT-14017, Supplier Part Number 1=1568-1462-ND, Accessory Type=Connector, Category="Development Boards, Kits, Programmers", ComponentLink1Description=https://cdn.sparkfun.com/datasheets/Dev/RaspberryPi/12313.pdf, ComponentLink1URL=https://cdn.sparkfun.com/datasheets/Dev/RaspberryPi/12313.pdf, For Use With/Related Products="Raspberry Pi", Nils Minor=author, nilsminor@web.de=mail, Part Status=Active, Pricing 1="1=1.84 (EUR)", RoHS="RoHS Compliant", Stock 1=150, Supplier 1=Digi-Key
U1: library part CMP-2000-05370-1, "EEPROM Serial-I2C, 2Kbit, 2.5 to 5.5 V, 400 kHz, 8-Pin SO, -40 to 85 degC, RoHS, Tape and Reel", Frequency=0.4MHz, Manufacturer=STMicroelectronics, Operating Supply Voltage (Max)=5.5V, Operating Supply Voltage (Min)=2.5V, Operating Supply Voltage (Typ)=3.3/5V, Operating Temperature (Max)=85C, Operating Temperature (Min)=-40C, Operating Temperature Classification=Industrial, Operating Temp Range=-40Cto85C, Package Type=SOICN, Supply Current=2mA, Access Time (Max)=900ns, Data Retention=40, Datasheet URL=https://datasheet.ciiva.com/26870/m24c02-wmn6tp-26870257.pdf, Datasheet Version="Rev. 17, 04/2011", DELETED=Compliant, Density=2048Bit, Frequency (Max)=0.4MHz, Interface Type=Serial(I2C), Manufacturer URL=http://www.st.com/, Mounting=SurfaceMount, Organization=256x8, Packaging=TapeandReel, Pin Count=8, Programmable=Yes, Rad Hardened=No, Write Protection=Yes
U2: library part CMP-0323-00125-3, "Buck Step Down Regulator with 3 to 17 V Input and 5 V Output, -40 to 85 degC, 16-Pin QFN (RGT), Green (RoHS & no Sb/Br)", Manufacturer="Texas Instruments", Rating=Catalog, Switch Current Limit(Typ)(A)=3, Code_JEDEC=MO-220, ComponentLink1Description=Datasheet, ComponentLink1URL=http://www.ti.com/general/docs/lit/getliterature.tsp?genericPartNumber=TPS62143&fileType=pdf, ComponentLink2Description="Package Specification", ComponentLink2URL=http://www.ti.com/litv/pdf/mpqf119g, ComponentLink3Description="URL Link1", ComponentLink3URL="Samples URL:http://www.ti.com/product/tps54611#samples", DatasheetVersion=SLVSAJ0, Duty Cycle(Max)(%)=100, Eco-Plan="Green (RoHS & no Sb/Br)", Iout(Max)(A)=2, Iq(Typ)(mA)=0.017, Mounting Technology="Surface Mount", PackageDescription="16-Pin Plastic Quad Flat No-Lead, 3 x 3 mm Body, 0.5 mm Pitch, 1.7 x 1.7 mm Exposed Pad", PackageReference=RGT0016C, PackageVersion="revH, Oct-2011", PartNumber=TPS62143RGTT, Preset Vout(V)=5, Regulated Outputs(#)=1, SubFamily="Step-Down Regulator", Synchronous Rectification=TRUE, Topology=Buck, Vin(Max)(V)=17, Vin(Min)(V)=3, Vout(Max)(V)=5, Vout(Min)(V)=5
U3: library part CMP-0694-00015-2, "3.3 V Supply RS-485 with IEC ESD Protection, 20 Mbps, -40 to 125 degC, 8-Pin SON, RoHS, Tape and Reel", Manufacturer="Texas Instruments", Operating Temperature Range="-40 to 125 degC", ComponentLink1Description="Manufacturer URL", ComponentLink1URL=http://www.ti.com/, ComponentLink2Description=Datasheet, ComponentLink2URL=http://www.ti.com/lit/ds/sllse11c/sllse11c.pdf, ComponentLink3Description="Package Specification", ComponentLink3URL=http://www.ti.com/lit/ds/sllse11c/sllse11c.pdf, DatasheetVersion=SLLSE11C, ESD="15 kV", ICC (Max) (mA)=0.95, Mounting Technology="Surface Mount", No. of RX=1, No. of TX=1, PackageDescription="8-Pin Plastic Small Outline No-Lead, Body 3 x 3 mm, Pitch 0.65 mm", PackageReference=DRB0008B, PackageVersion=4203482-2/K, Packing="Tape and Reel", PartNumber=SN65HVD75DRBT, RoHS=TRUE, Signaling Rate (Max) (Mbps)=20, VCC="3 to 3.6 V", VI="-7 to 12 V"
U6: library part CMP-2000-06815-1, "TinyLogic(R) UHS 2-Input AND Gate, 1.65 to 5.5 V, -40 to 85 degC, 5-Pin SOT23, RoHS, Tape and Reel", High Level Output Current=-32mA, Low Level Output Current=32mA, Manufacturer=FairchildSemiconductor, Maximum Operating Temperature=+85C, Minimum Operating Temperature=-40C, Package / Case=SOT-23, Package Description="5-Pin Small Outline Transistor, Body 2.9 x 1.6 mm, Pitch 0.95 mm", Package Reference=SOT23-5, Package Version=08/2015, Supply Voltage - Max=5.5V, Supply Voltage - Min=1.65V, =NC7SZ08M5X_NL, <PCN>=http://www.mouser.com/PCN/3.26.10LTBDFairchild.pdf, Brand=FairchildSemiconductor, Datasheet URL=https://www.fairchildsemi.com/datasheets/NC/NC7SZ08.pdf, Datasheet Version="Rev. 1.0.3, 09/2009", Logic Family=NC7SV, Logic Function=AND, Logic Type=2-InputAND, Manufacturer URL=https://www.fairchildsemi.com/, Mounting Style=SMD/SMT, Mounting Technology=SurfaceMount, Number of Gates=1Gate, Number of Input Lines=2Input, Number of Output Lines=1Output, Package URL=https://www.fairchildsemi.com/package-drawings/MA/MA05B.pdf, Packaging=Reel, Product=Single-FunctionGate, Product Category=LogicGates, Propagation Delay Time=5.2ns, RoHS=True, Series=TinyLogic, Unit Weight=0.001058oz
U7: library part CMP-2000-06280-1, "Phototransistor Optocoupler, 4 us Rise, 3 us Fall, 5000 Vrms, -55 to 110 degC, 4-Pin MDIP, RoHS, Tape and Reel", Manufacturer="Fairchild Semiconductor", Maximum Collector Current=50mA, Maximum Collector Emitter Saturation Voltage=200mV, Maximum Collector Emitter Voltage=70V, Maximum Current Transfer Ratio=260%, Maximum Forward Voltage=1.4V, Maximum Operating Temperature=110C, Maximum Power Dissipation=200mW, Maximum Reverse Voltage=6V, Minimum Current Transfer Ratio=130%, Minimum Isolation Voltage=5000Vrms, Minimum Operating Temperature=-55C, Package Description="4-Pin Surface Mount Device, Body 6.5 x 4.6 mm, Pitch 2.54 mm", Package Reference="MDIP 4L", Package Version=10/2014, Supplier_Package=PDIPSMDBlack, Typical Forward Voltage=1.2V, Datasheet URL=https://www.fairchildsemi.com/datasheets/FO/FOD817B.pdf, Datasheet Version="Rev. 2.8, 11/2015", Family=FOD817, Input Type=DC, Manufacturer URL=https://www.fairchildsemi.com/, Maximum Fall Time=18us, Maximum Input Current=50mA, Maximum Rise Time=18us, Mounting=SurfaceMount, Mounting Technology=SurfaceMount, Number of Channels per Chip=1, Output Device=Transistor, Output Type=DC, Package URL=https://www.fairchildsemi.com/package-drawings/N0/N04C.pdf, Packaging=TapeandReel, Pin_Count=4, Product Height=4mm(Max), Product Length=5.1mm(Max), Product Type=TransistorandPhotovoltaicOutputPhotoCouplers, Product Width=7mm(Max), Typical Fall Time=3us, Typical Rise Time=4us

## Free pads (board coordinates)
  round 6 hole 2.75: ""(3.5,3.5) ""(3.5,52.5) ""(61.5,3.5) ""(61.5,52.5)

## Via types
v1: diameter 0.6, hole 0.35, Top Layer to Bottom Layer, 28 vias
v2: diameter 0.6, hole 0.3, Top Layer to Bottom Layer, 18 vias
v3: diameter 0.5, hole 0.25, Top Layer to Bottom Layer, 11 vias
v4: diameter 1.27, hole 0.711, Top Layer to Bottom Layer, 6 vias
v5: diameter 0.5, hole 0.3, Top Layer to Bottom Layer, 6 vias
v6: diameter 0.5, hole 0.2, Top Layer to Bottom Layer, 4 vias
v7: diameter 1, hole 0.35, Top Layer to Bottom Layer, 1 vias

## Nets (pads, with @x,y where several pads share a name; then routed paths per layer and width w, separated by ;. In a path a pad name is that pad's centre, name@x,y a point inside that pad or via, vN(x,y) a via of type N, cw(c..) or ccw(c..) an arc to the next point about the centre after c; other vN are vias at no path point)
+3V3: C2.1 C7.2 R4.2 R5.2 R6.2 RPI1.1 RPI1.17 U1.8 U3.8 | length 15.4
  Top Layer w0.17: R6.2 R5.2@39.67,47.205 ; R4.2 43.1,45.535 v7(43.1,46.83)
  Top Layer w0.254: U3.8 31.6,46.425 30.85,47.175 C7.2 v2(31.9,47.2) ; v3(37.5,42.8) 37.595,42.705 C2.1 ; C2.1@37.595,41.315 38.476,41.315 39.424,42.263 39.424,43.399 39.556,43.531 39.556,45.251 R6.2@39.77,45.465
  Top Layer w0.305: C2.1@37.595,41.315 C2.1
  Bottom Layer w0.17: 42.65,45.235 43.1,45.685 v7(43.1,46.83)
+5: C4.2 C13.1 J1.1 L1.2 R1.2 R7.2 RPI1.2 RPI1.4 U2.14 U6.1 U6.5 | length 14.9
  Top Layer w0.203: R1.2 v2(7.7,46.2) ; U2.14 21.65,38.15 v1(22.2,37.6) ; U6.5 28.85,33.428 29.098,33.677 30.452,33.677 C13.1 v1(30.8,33) ; U6.1 29.052,36.202 29.052,37.402 R7.2 ; R7.2@29.35,37.8 R7.2 ; v1(30.5,37.7) R7.2
  Bottom Layer w0.203: v1(22.2,37.6) 22.2,42.445 22.6,42.845 v1(22.6,42.9)
  other v2: 57.1,24.3 58,24.3 58.9,24.3 57.1,25.2 58,25.2 58.9,25.2 17.2,46.9 18.3,46.9 19.4,46.9 20.5,46.9
EN: J3.2 U2.13 | length 41.2
  Top Layer w0.203: J3.2 J3.2@7.2,14.35 ; U2.13 20.775,37.65 21.625,36.8 v1(23.1,36.8) ; v1@23.05,14.35 v1(23.1,14.4)
  Top Layer w0.254: J3.2@7.2,14.35 v1@23.05,14.35
  Bottom Layer w0.254: v1(23.1,14.4) v1(23.1,36.8)
GND: C1.1 C2.2 C4.1 C5.2 C6.1 C7.1 C12.2 C13.2 C14.2 DS1.2 J1.5 J1.8 J1.MP1 J1.MP2 J3.3 J3.MP1 J3.MP2 P1.1 P2.1 P3.1 R9.2 RPI1.6 RPI1.9 RPI1.14 RPI1.20 RPI1.25 RPI1.30 RPI1.34 RPI1.39 U1.1 U1.2 U1.3 U1.4 U2.5 U2.6 U2.7 U2.8 U2.15 U2.16 U2.17@19.2,38.4 U3.5 U3.9 U6.3 U7.2 U7.3 | length 21
  Top Layer w0.203: C12.2 v1(20.2,30) ; U7.3 v1(22.2,31.3) ; v1(26.7,37.1) 26.95,36.85 U6.3 ; C13.2 v1(30.8,36.5) ; R9.2 v1(32.1,41) ; U7.2 31.53,29.9 v1(32.6,29.9) ; C2.2 37.595,38.905 v1(37.6,38.9)
  Top Layer w0.254: DS1.2@2.1,46.125 DS1.2 2.2,46.225 v5(2.2,47.4) ; U2.8 U2.7 U2.6 U2.5 ; v2(28.4,47.2) C7.1 ; U3.5 31.625,43.1 v2(32.55,43.1) v2@32.5,43.1 ; v1(39.5,36.5) 39.49,36.51 U1.1 U1.2 U1.3 U1.4 ; J1.5 v1(60.9,28.3)
  Top Layer w0.305: J1.8@59.798,29.802 J1.8
  Top Layer w0.508: J3.3 v1(8.4,13.3) ; v4@9.275,38.325 v4(9.3,38.3) ; P1.1@9.275,40.375 P1.1 P1.1@9.275,40.425 ; v4@9.275,42.475 v4(9.3,42.5)
  other v2: 57.5,30.1 58.5,30.1 57.5,31 58.5,31
  other v3: 24.3,33.3 24.3,34.1 24.3,34.9 15.3,35.2 24.3,35.7 15.3,36 23.8,38.7 16,39.5 16.8,39.5 23.8,39.5
  other v4: 9.3,20.8 9.3,25.3 1.9,29.4 1.8,34.3
  other v5: 18.7,37.9 19.7,37.9 19.2,38.4 18.7,38.9 19.7,38.9
  other v6: 30.2,43.15 29.625,44.1 30.775,44.1 30.2,45.05
GPIO0: J1.2 RPI1.31 | length 32.5
  Top Layer w0.254: v1(56.4,26.4) 58.3,26.4 58.7,26.8 J1.2
  Bottom Layer w0.254: RPI1.31 56.4,41.3 v1(56.4,26.4)
"I2C SCL": RPI1.5
"I2C SDA": RPI1.3
NetC12_1: C12.1 Q3.4 R17.1 U7.4 | length 14.9
  Top Layer w0.203: v1(14.2,28.2) 14.2,29.35 R17.1 14.22,29.57 Q3.4 ; C12.1 C12.1@20.3,27.525 ; v1(20.3,26.4) C12.1@20.3,27.525 ; U7.4 22.153,27.277 20.548,27.277 C12.1@20.3,27.525
  Bottom Layer w0.203: v1(14.2,28.2) 14.82,28.82 19.205,28.82 20.3,27.725 v1(20.3,26.4)
NetDS1_1: DS1.1 R1.1 | length 1.2
  Top Layer w0.178: DS1.1@3.995,46.125 4.07,46.2 R1.1
NetJ3_1: J3.1 RPI1.19 | length 63.5
  Top Layer w0.254: J3.1 v1(33.7,15.3)
  Bottom Layer w0.254: RPI1.19 33.7,48.76 v1(33.7,15.3)
NetP2_2: P2.2 R6.1 U1.7 | length 7.8
  Top Layer w0.178: R6.1@41.02,45.465 40.76,45.205 40.76,43.465 40.76,42.94 41.795,41.905 45.495,41.905
NetR4_1: R4.1 RPI1.27 U1.5 | length 9.8
  Top Layer w0.178: RPI1.27 44.52,48.1 R4.1 44.52,44.713 43.867,44.06 43.495,44.06 43.3,43.865 U1.5@43.3,43.465
NetR5_1: R5.1 RPI1.28 U1.6 | length 11.7
  Top Layer w0.178: R5.1@41.12,47.28 41.12,47.13 42.03,46.22 U1.6 U1.6@42.03,43.465 ; R5.1 41.125,47.305 40.1,48.33 40.1,52.48 RPI1.28
NetR15_1: R15.1 U6.4 | length 2.3
  Top Layer w0.203: U6.4 26.95,33.25 28.077,32.123 28.177,32.123 28.425,31.875 R15.1
NetR15_2: R15.2 U7.1 | length 5.3
  Top Layer w0.203: R15.2 29.575,29.155 31.4,27.33 U7.1
NetRPI1_11: RPI1.11
NetRPI1_12: RPI1.12
NetRPI1_13: RPI1.13
NetRPI1_15: RPI1.15
NetRPI1_16: RPI1.16
NetRPI1_18: RPI1.18
NetRPI1_21: RPI1.21
NetRPI1_22: RPI1.22
NetRPI1_23: RPI1.23
NetRPI1_24: RPI1.24
NetRPI1_26: RPI1.26
NetRPI1_32: RPI1.32
NetRPI1_33: RPI1.33
NetRPI1_35: RPI1.35
NetRPI1_36: RPI1.36
NetRPI1_37: RPI1.37
NetRPI1_38: RPI1.38
NetRPI1_40: RPI1.40
PG: R7.1 U2.4 U6.2 | length 12.8
  Top Layer w0.203: v1(16.7,40.9) 17.35,40.9 18.252,39.998 18.427,39.998 18.45,39.975 U2.4 ; v1(24.9,40.65) R7.1 27.9,37.65 U6.2
  Bottom Layer w0.203: v1(24.9,40.65) v1(24.9,45.2)
RS485_N: J1.6 R8.1 U3.6 | length 38.4
  Top Layer w0.157: U3.6 31.75,43.775 31.822,43.847 31.822,43.866 31.913,43.958 33.351,43.958 33.443,43.866 33.443,43.657 R8.1 34.157,43.657 34.157,43.866 34.249,43.958 34.641,43.958 34.999,43.6 34.999,38.4 44.491,28.908 59.244,28.908 59.283,28.868 59.732,28.868 J1.6
RS485_P: J1.7 R8.2 U3.7 | length 38.4
  Top Layer w0.157: U3.7 31.75,44.425 31.822,44.353 31.822,44.334 31.913,44.242 33.351,44.242 33.443,44.334 33.443,44.543 R8.2 34.157,44.543 34.157,44.334 34.249,44.242 34.758,44.242 35.283,43.717 35.283,38.517 44.608,29.192 59.244,29.192 59.283,29.232 59.732,29.232 J1.7
RTS: J1.4 R9.1 RPI1.7 U3.2 U3.3 | length 57.6
  Top Layer w0.157: RPI1.7 15.99,51.21 17.7,49.5 22.3,49.5 v1(27.4,44.4) 27.812,44.412 28.788,44.412 U3.2 U3.3 ; v1(27.4,41) R9.1 29.4,40.95 42.55,27.8 J1.4
  Bottom Layer w0.157: v1(27.4,41) v1(27.4,44.4)
RX: RPI1.10 U3.1 | length 15
  Top Layer w0.157: v1(27.6,45.6) 28.125,45.075 U3.1
  Bottom Layer w0.157: RPI1.10 19.9,52.4 19.9,50.5 20.5,49.9 23.3,49.9 v1(27.6,45.6)
SigOut: J1.3 RPI1.29 | length 36.4
  Top Layer w0.254: v1(54.9,26.4) 55.8,27.3 J1.3
  Bottom Layer w0.254: RPI1.29 45.26,49.9 46.9,49.9 55.8,41 55.8,27.3 v1(54.9,26.4)
SS/TR: C6.2 U2.9 | length 2.1
  Top Layer w0.203: C6.2 16.425,37 U2.9
SW: L1.1 U2.1 U2.2 U2.3
TX: RPI1.8 U3.4 | length 20
  Top Layer w0.157: v1(26.5,43.1) 26.525,43.125 U3.4
  Bottom Layer w0.157: RPI1.8 17.3,52.46 17.3,50.6 18.4,49.5 23,49.5 26.5,46 v1(26.5,43.1)
VIN: C1.2 C5.1 C14.1 J3.4 P1.2 Q3.1 Q3.2 Q3.3 R17.2 U2.10 U2.11 U2.12 | length 30.5
  Top Layer w0.203: C5.1 17.675,35.55 18.313,36.187 18.587,36.187 18.95,36.55 U2.10
  Top Layer w0.406: J3.4 2.3,12.3 1.95,12.65 1.95,25.1 8.65,31.8 C14.1
VSWITCH: P3.2 Q3.5 Q3.6 Q3.7 Q3.8
pads on no net: P1.MH1 P3.MH1 U2.17@19.2,38.4

## Polygon pours and split planes (outlines as drawn)
GND on Top Layer "GND_L01_P086" (solid, pour order 86): 0,56 65,56 65,0 0,0
+5 on Top Layer "+5_L01_P084" (solid, pour order 84): 59.1,26.5 58.5,25.9 57,25.9 56.6,25.5 56.6,23.9 56.7,23.8 59.6,23.8 59.85,24.05 60.3,24.5 60.3,26.5
GND on Top Layer "GND_L01_P082" (solid, pour order 82): 60.3,29.6 57.1,29.6 57,29.7 57,31.4 57.1,31.5 59,31.5 59.1,31.4 59.1,30.2 59.2,30.1 60.3,30.1
+5 on Top Layer "Top Layer-+5" (solid, pour order 78): 16.2,44.6 15.85,44.95 15.9,47.5 16.2,47.8 17.9,47.8 21.3,47.8 23.7,45.4 23.7,40.8 23.2,40.3 21.7,40.3 21.5,40.5 21.5,44 21,44.5
VSWITCH on Top Layer "VSWITCH_L01_P080" (solid, pour order 80): 14.3,21.2 14.3,23.8 14.6,24.1 17.2,24.1 18.1,24.1 18.4,24.4 18.4,26.63 11.413,26.63 11,26.2 11,21.3 11.3,21 14.1,21
GND on Top Layer "GND_L01_P072" (solid, pour order 72): 20.3,38.5 21.4,38.5 21.7,38.2 24.2,38.2 24.4,38.4 24.4,39.7 24.1,40 21.085,40 20.3,39.215
SW on Top Layer "SW_L01_P066" (solid, pour order 66): 18.7,39.5 18.7,41.3 18.2,41.8 16.804,42.079 16.75,43.55 17,43.8 20.7,43.8 21.05,43.45 21.05,41.85 20.1,40.9 20.1,39.5
SW on Top Layer "SW_L01_P064" (solid, pour order 64): 19.3,39.5
GND on Top Layer "GND_L01_P049" (solid, pour order 49): 14.9,36.35 16.95,36.35 17,36.3 17,34.75 14.8,34.75 14.8,36.25
GND on Top Layer "GND_L01_P048" (solid, pour order 48): 17.2,37.65 17.15,37.7 15.65,37.7 15.6,37.75 15.6,39.8 15.7,39.9 17.6,39.9 18,39.5 18,37.7 17.95,37.65
VIN on Top Layer "VIN_L01_P050" (solid, pour order 50): 16.2,30.7 16.7,30.2 16.7,29.2 18.4,29.2 18.6,29.4 18.6,30.5 21,32.9 21,35.7 20.49,36.21 20.49,36.91 20.1,37.3 19.2,37.3 19.2,36.4 18.7,35.9 18.7,35.1 18.3,34.7 18,34.7 17.9,34.8 17.9,35.3 17.525,35.3 17.525,34.825 17,34.3 14,34.3 13.5,34.8 13.5,41.1 13,41.6 11.5,41.6 10.9,41 10.9,34.8 9.2,33.1 7.3,33.1 7.1,32.9 7.1,30.9 7.3,30.7
no net on Top Layer "NONET_L04_P-001" (solid, pour order 59): 10.9,43.75
no net on Top Layer "NONET_L01_P063" (solid, pour order 63): 53.7,45.85
no net on Top Layer "NONET_L01_P053" (solid, pour order 53): 51.4,28.5
no net on Top Layer "NONET_L01_P058" (solid, pour order 58): 53.9,28.3
no net on Top Layer "NONET_L01_P056" (solid, pour order 56): 0.325,39.562
no net on Top Layer "NONET_L01_P054" (solid, pour order 54): 12.4,37.8
no net on Top Layer "NONET_L01_P052" (solid, pour order 52): 9.2,35.8
no net on Top Layer "NONET_L01_P061" (solid, pour order 61): 8.8,34.8
no net on Top Layer "NONET_L01_P060" (solid, pour order 60): -0.05,39.525
GND on Int1 (GND) (split plane): 3.5,55.49 61.5,55.49 61.515,55.491 61.73,55.483 61.963,55.455 62.193,55.409 62.419,55.346 62.639,55.264 62.852,55.166 63.057,55.051 63.252,54.921 63.436,54.776 63.609,54.617 63.768,54.444 63.913,54.26 64.043,54.065 64.158,53.86 64.256,53.647 64.338,53.427 64.401,53.201 64.447,52.971 64.475,52.738 64.483,52.517 64.482,52.5 64.482,3.5 64.483,3.483 64.475,3.262 64.447,3.029 64.401,2.799 64.338,2.573 64.256,2.353 64.158,2.14 64.043,1.935 63.913,1.74 63.768,1.556 63.609,1.383 63.436,1.224 63.252,1.079 63.057,0.949 62.852,0.834 62.639,0.736 62.419,0.654 62.193,0.591 61.963,0.545 61.73,0.517 61.515,0.509 61.5,0.51 3.5,0.51 3.484,0.509 3.265,0.517 3.032,0.545 2.802,0.591 2.575,0.655 2.355,0.736 2.142,0.834 1.937,0.949 1.741,1.08 1.557,1.225 1.385,1.385 1.225,1.557 1.08,1.741 0.949,1.937 0.834,2.142 0.736,2.355 0.655,2.575 0.591,2.802 0.545,3.032 0.517,3.265 0.509,3.484 0.51,3.5 0.51,52.5 0.509,52.516 0.517,52.735 0.545,52.968 0.591,53.198 0.655,53.425 0.736,53.645 0.834,53.858 0.949,54.063 1.08,54.259 1.225,54.443 1.384,54.615 1.557,54.775 1.741,54.92 1.937,55.051 2.142,55.166 2.355,55.264 2.575,55.345 2.802,55.409 3.032,55.455 3.265,55.483 3.484,55.491
+3V3 on Int2 (PWR) (split plane): 61.73,55.483 61.963,55.455 62.193,55.409 62.419,55.346 62.639,55.264 62.852,55.166 63.057,55.051 63.252,54.921 63.436,54.776 63.609,54.617 63.768,54.444 63.913,54.26 64.043,54.065 64.158,53.86 64.256,53.647 64.338,53.427 64.401,53.201 64.447,52.971 64.475,52.738 64.483,52.517 64.482,52.5 64.482,32.677 32.777,32.677 32.777,38.8 32.773,38.834 32.77,38.869 32.77,38.871 32.77,38.874 32.76,38.907 32.75,38.94 32.749,38.942 32.748,38.944 32.732,38.975 32.716,39.005 32.714,39.007 32.713,39.009 32.691,39.036 32.67,39.063 32.668,39.065 32.666,39.066 32.64,39.088 32.613,39.111 32.611,39.112 32.609,39.113 32.579,39.13 32.549,39.146 32.546,39.147 32.544,39.148 32.511,39.158 32.478,39.169 32.476,39.169 32.474,39.17 32.439,39.173 32.405,39.177 24.877,39.272 24.877,44.4 24.87,44.474 24.848,44.544 24.813,44.609 24.766,44.666 24.709,44.713 24.644,44.748 24.574,44.77 24.5,44.777 22.454,44.777 22.454,55.49 61.5,55.49 61.515,55.491
+5 on Int2 (PWR) (split plane): 3.5,55.49 21.7,55.49 21.7,44.4 21.707,44.326 21.729,44.256 21.764,44.191 21.81,44.134 21.867,44.087 21.933,44.052 22.003,44.03 22.077,44.023 24.123,44.023 24.123,38.9 24.127,38.866 24.13,38.831 24.13,38.829 24.13,38.826 24.14,38.793 24.15,38.76 24.151,38.758 24.152,38.756 24.168,38.725 24.184,38.695 24.186,38.693 24.187,38.691 24.209,38.664 24.23,38.637 24.232,38.635 24.234,38.634 24.26,38.612 24.287,38.589 24.289,38.588 24.291,38.587 24.321,38.57 24.351,38.554 24.354,38.553 24.356,38.552 24.389,38.542 24.422,38.531 24.424,38.531 24.426,38.53 24.461,38.527 24.495,38.523 32.023,38.428 32.023,32.3 32.03,32.226 32.052,32.156 32.087,32.091 32.134,32.034 32.191,31.987 32.256,31.952 32.326,31.93 32.4,31.923 64.482,31.923 64.482,3.5 64.483,3.483 64.475,3.262 64.447,3.029 64.401,2.799 64.338,2.573 64.256,2.353 64.158,2.14 64.043,1.935 63.913,1.74 63.768,1.556 63.609,1.383 63.436,1.224 63.252,1.079 63.057,0.949 62.852,0.834 62.639,0.736 62.419,0.654 62.193,0.591 61.963,0.545 61.73,0.517 61.515,0.509 61.5,0.51 3.5,0.51 3.484,0.509 3.265,0.517 3.032,0.545 2.802,0.591 2.575,0.655 2.355,0.736 2.142,0.834 1.937,0.949 1.741,1.08 1.557,1.225 1.385,1.385 1.225,1.557 1.08,1.741 0.949,1.937 0.834,2.142 0.736,2.355 0.655,2.575 0.591,2.802 0.545,3.032 0.517,3.265 0.509,3.484 0.51,3.5 0.51,52.5 0.509,52.516 0.517,52.735 0.545,52.968 0.591,53.198 0.655,53.425 0.736,53.645 0.834,53.858 0.949,54.063 1.08,54.259 1.225,54.443 1.384,54.615 1.557,54.775 1.741,54.92 1.937,55.051 2.142,55.166 2.355,55.264 2.575,55.345 2.802,55.409 3.032,55.455 3.265,55.483 3.484,55.491

## Other copper
Bottom Layer:
  pour cut-out: 18.3,40.55 18.5,40.35 18.5,39.65 18.65,39.5 19.95,39.5 20.1,39.65 20.1,40.9 21.2,42 21.2,44.05 20.95,44.3 16.7,44.3 16.3,43.9 16.3,42.2 16.6,41.9 17.8,41.9 18.3,41.4
Int1 (GND) (plane layer: these items are gaps in the copper):
  pour cut-out: 18.3,40.55 18.5,40.35 18.5,39.65 18.65,39.5 19.95,39.5 20.1,39.65 20.1,40.9 21.2,42 21.2,44.05 20.95,44.3 16.7,44.3 16.3,43.9 16.3,42.2 16.6,41.9 17.8,41.9 18.3,41.4
Int2 (PWR) (plane layer: these items are gaps in the copper):
  pour cut-out: 18.3,40.55 18.5,40.35 18.5,39.65 18.65,39.5 19.95,39.5 20.1,39.65 20.1,40.9 21.2,42 21.2,44.05 20.95,44.3 16.7,44.3 16.3,43.9 16.3,42.2 16.6,41.9 17.8,41.9 18.3,41.4
  lines w0.75: 22.05,55.95 22.077,55.923 22.077,44.4 23.9,44.4 24.5,44.4 24.5,38.9 32.4,38.8 32.4,32.3 65,32.3

## Silkscreen, mask and mechanical layers (free items; w line width, h text height)
Top Overlay:
  text "1" at 8.265,48.02 h0.89 r90
  text "12V" at 13.5,42.3 h1.52 r270
  text "SENSE" at 56.4,32.3 h1.5
  text "12V SW" at 13.6,27.3 h1.52 r270
  text "ON/OFF" at 9.8,17.9 h1.5 r270
  text "I" at 39.9,8 h20
  text "CPS Frames Touch Shield" at 15.9,3.4 h1.52
Bottom Overlay:
  circle w0.5: c7.75,49.25 r0.25
M2: Outline:
  lines w0.254: 0,3.5 0,52.5 cw(c3.5,52.5) 3.5,56 61.5,56 cw(c61.496,52.504) 64.992,52.5 64.992,3.5 cw(c61.496,3.496) 61.5,0 3.5,0

## Text inside footprints (layer, text, board x,y; h text height)
J1: Top Overlay "1" at 58.6,26.15 h1.02 r90; Top Overlay "8" at 58.6,29.45 h1.02 r90
J3: Top Overlay "1" at 7.1,16.4 h1.02 r270; Top Overlay "4" at 7.1,11.6 h1.02 r270